# EAGLE board ProiectTSC_pcb (EAGLE 9.7.0)
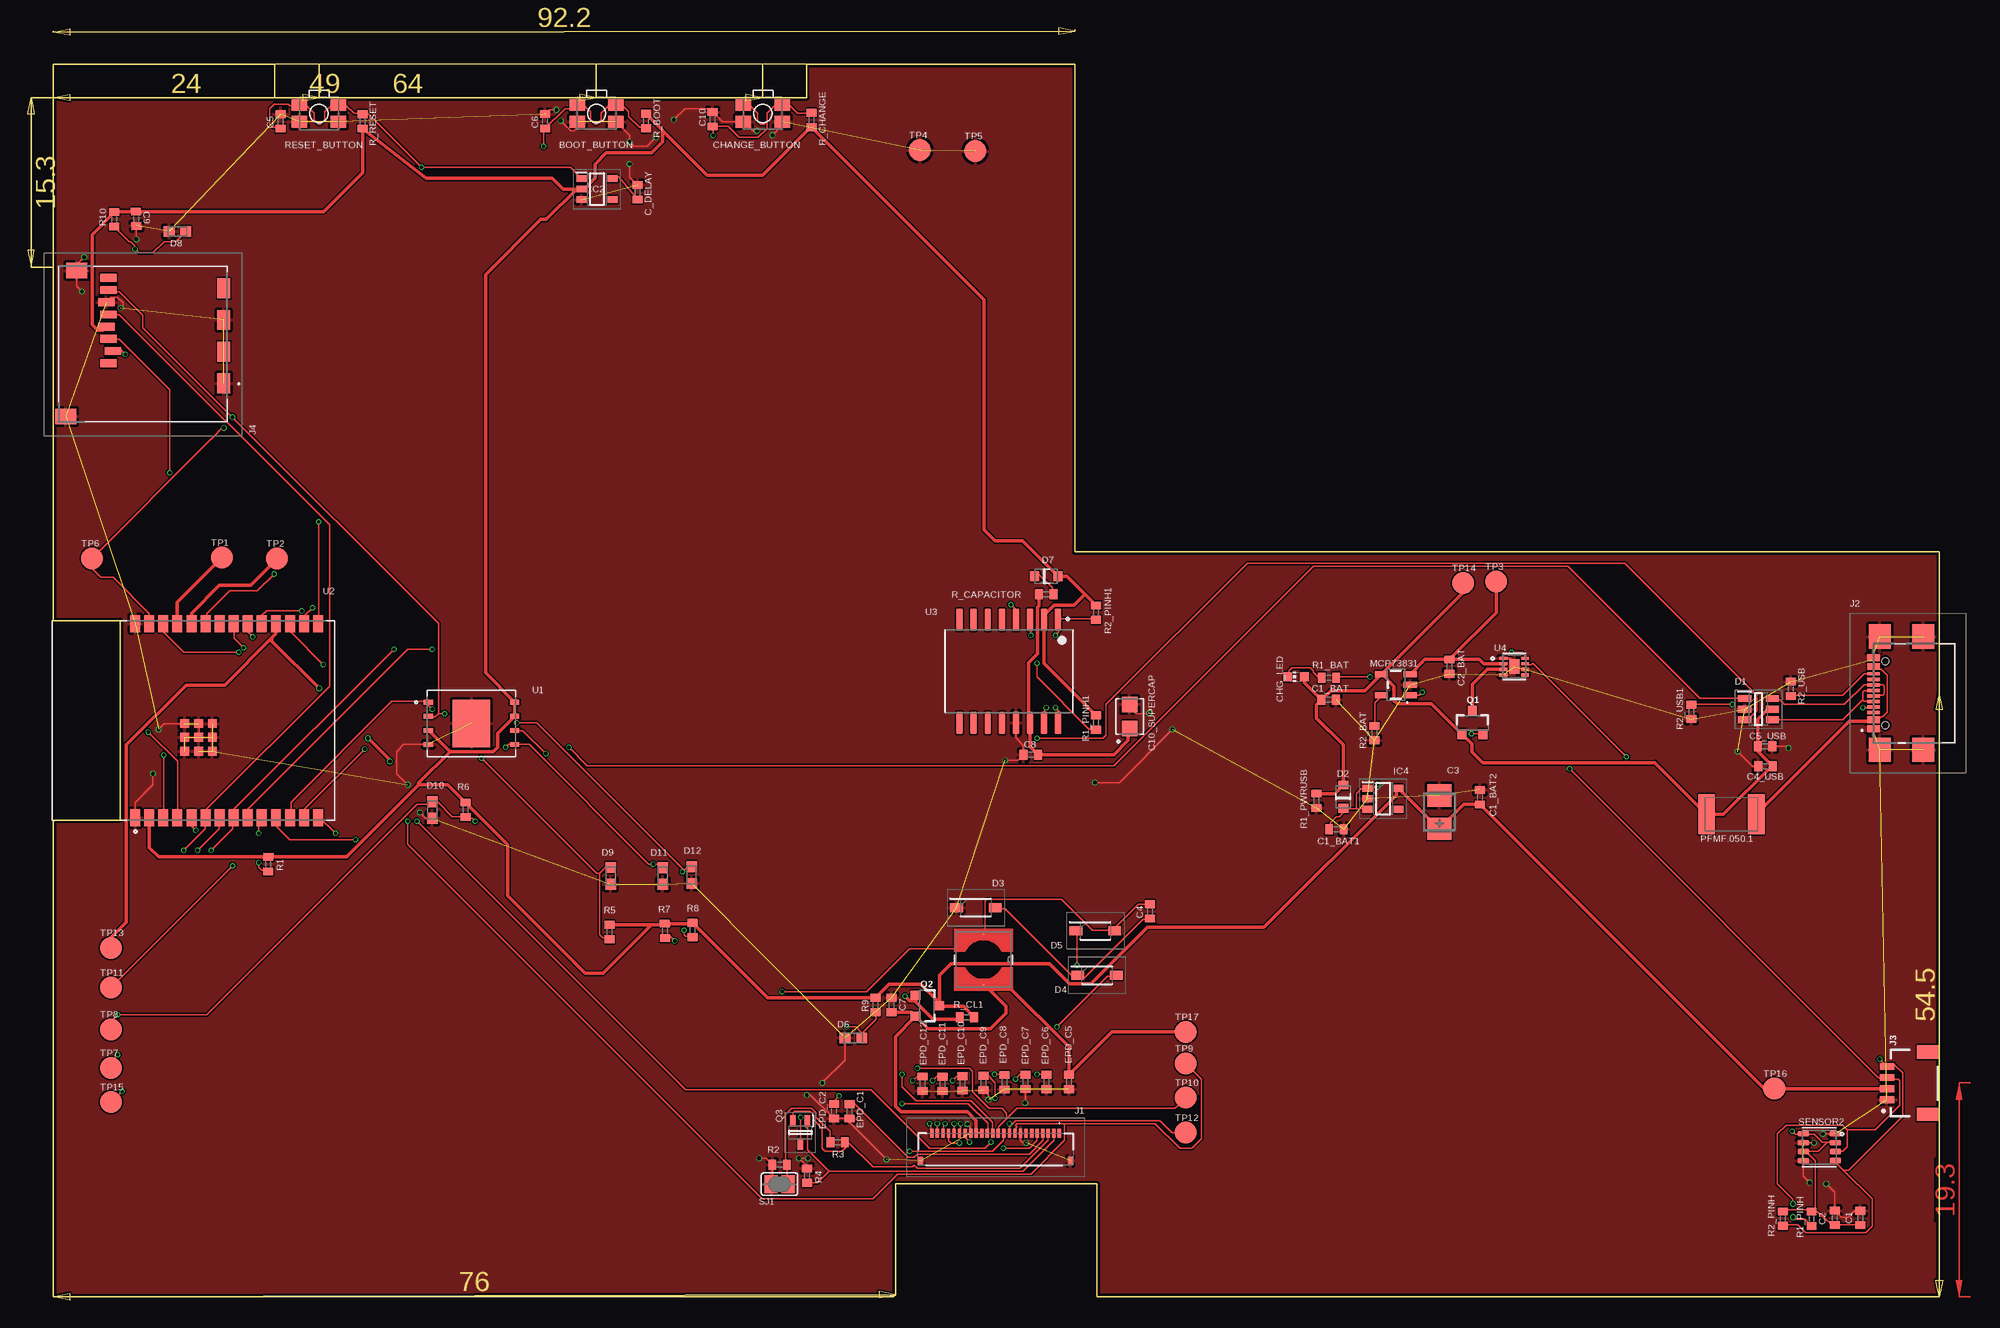
[diagram p0: board, top side]
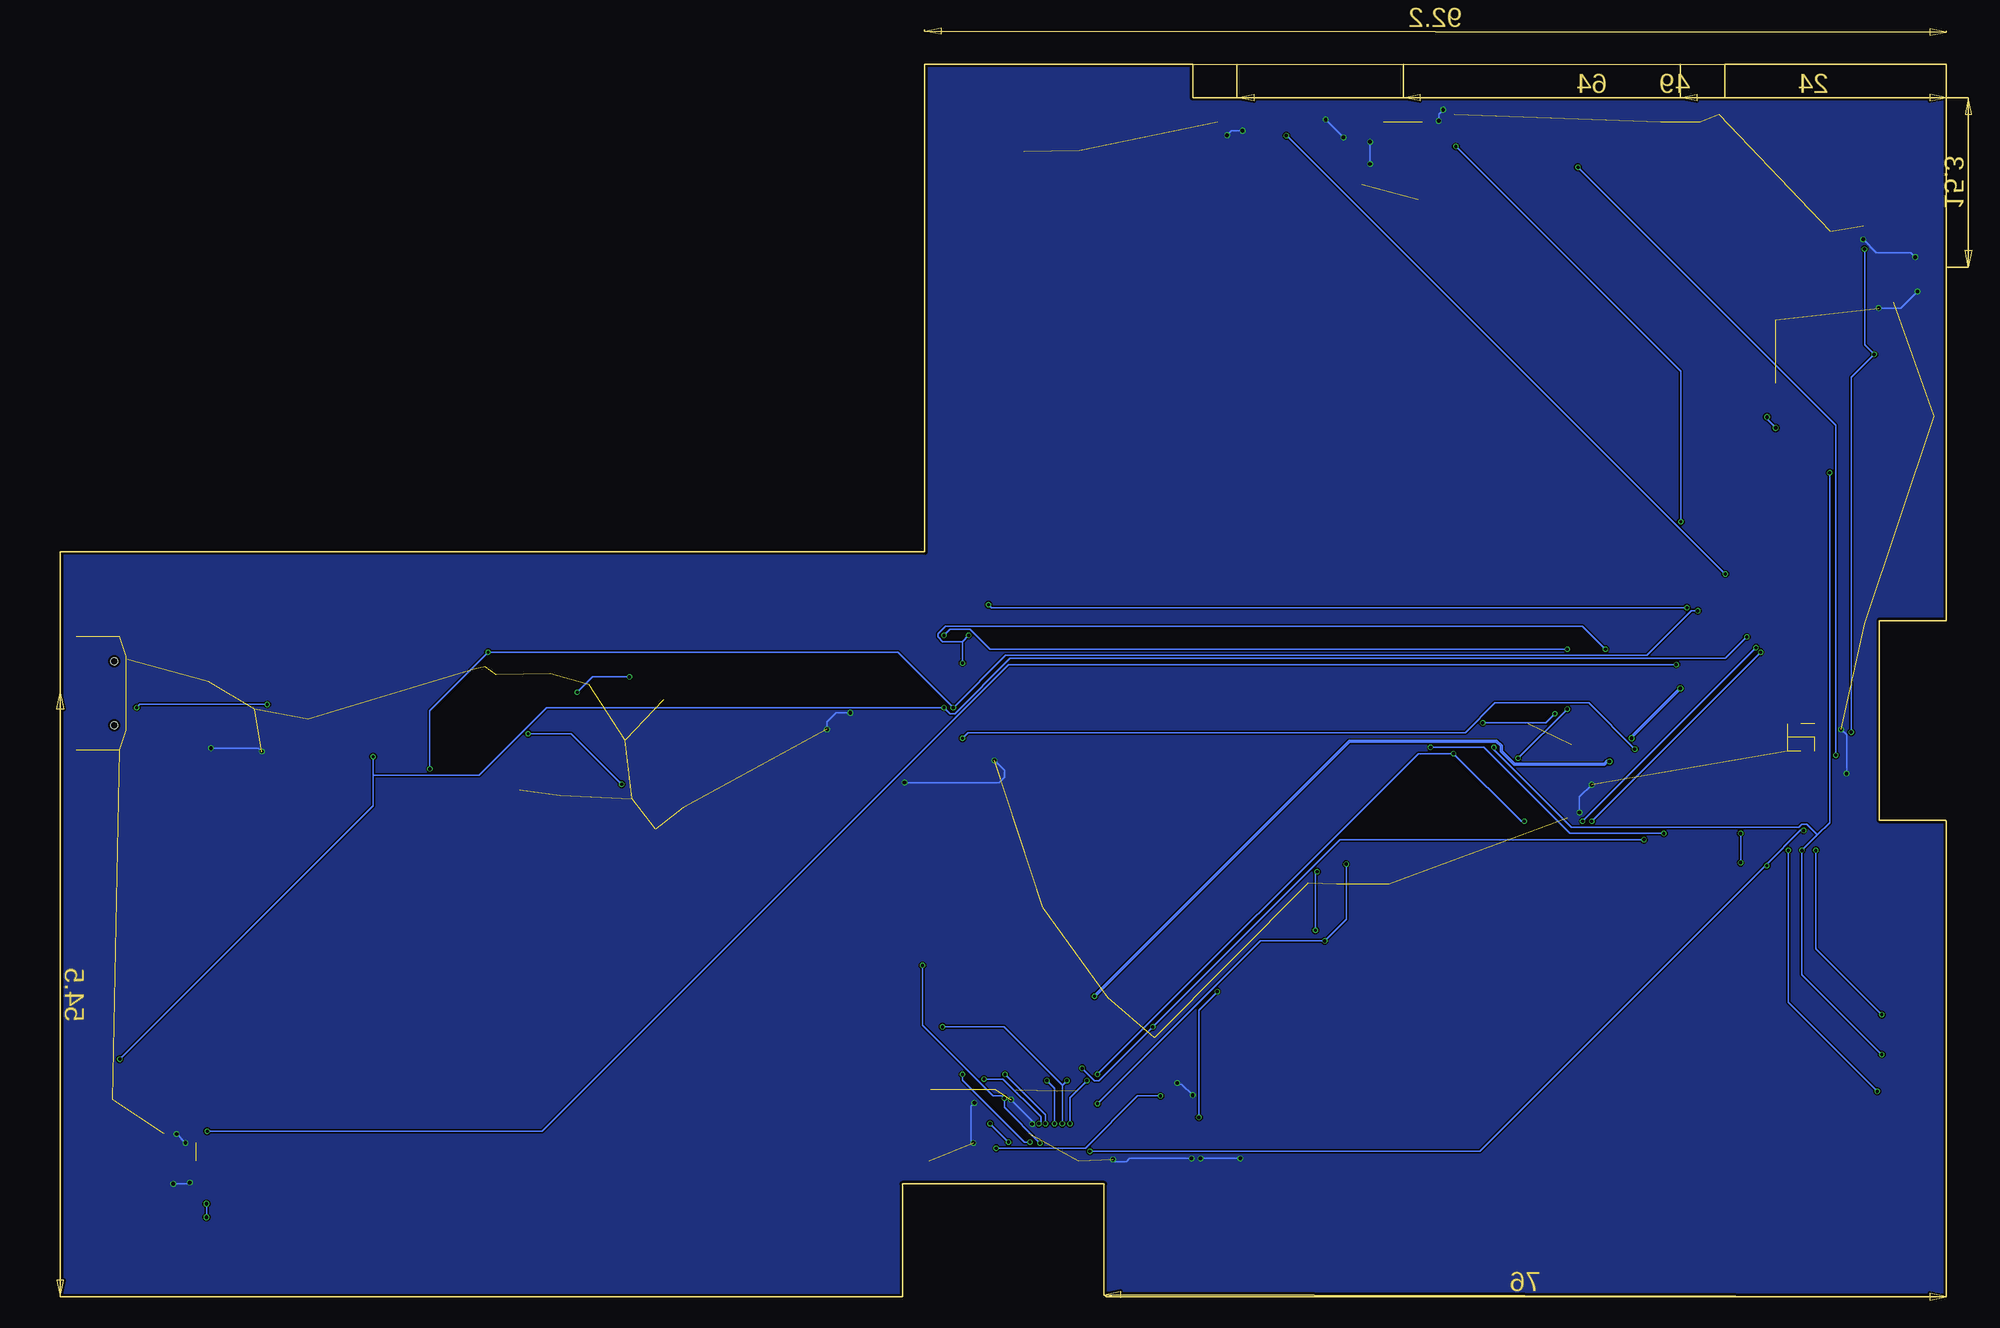
[diagram p1: board, bottom side, seen from below]

Size 170.2 x 111.2 mm. Coordinates in mm from the lower left corner, seen from the top.
Outline: 68,111.2 20,111.2
Outline: 20,111.2 20,108.2 68,108.2 68,111.2
Outline: 20,111.2 0,111.2 0,61 6.04,61 6.04,43 0.09,43 0,42.91 0,0 75.8,0 76,0.2 76,10.2 94.2,10.2 94.2,0 170.2,0 170.2,67.2 92.2,67.2 92.2,111.2 68,111.2
Copper layers (1*16): Top 0.035mm / dielectric 1.6mm / Bottom 0.035mm
Design rules "jlcpcb-2layers *": minimum track width 0.15mm, minimum drill 0.3mm, track to track 5mil, track to pad 5mil, pad to pad 5mil, via to via 5mil, smd to smd 5mil, copper to edge 0.2mm, drill to drill 6mil, minimum pad ring 10mil, minimum via ring 3mil, stop-mask expansion 4mil, vias tented up to drill 0mil, thermal gap 10mil

## Footprints (pad centres in the part's own frame; a part is rotated, then mirrored left to right if it is on the bottom)
MYBUTTON = smd 1.4 x 1.05: 1 1.75,0.75; 2 -1.75,0.75; 3 -1.75,-0.75; 4 1.75,-0.75
EAGLE-LTSPICE_C0402 = smd 0.7 x 0.9: 1 -0.65,0; 2 0.65,0
RCL_CT3528 = smd 2 x 2.2: + -1.5,0; - 1.5,0
CAPCP3225X100N = smd 1.4 x 1.4: 1 -1.1,0; 2 1.1,0
ADAFRUIT_CHIP-LED0603 = smd 0.8 x 0.8: A 0,-0.75; C 0,0.75
SOT95P280X145-6N = smd 1.2 x 0.6: 1 -1.25,0.95; 2 -1.25,0; 3 -1.25,-0.95; 4 1.25,-0.95; 5 1.25,0; 6 1.25,0.95
ESP32_WROVER_AVX---SD0805S020S1R0_AVX_SD0805S020S1R0_0 = smd 0.8 x 0.9: 1 -1.05,0; 2 1.05,0
SOD3716X135N = smd 1.15 x 0.8: 1 -1.75,0; 2 1.75,0
DIOC1608X36N = smd 0.97 x 0.94: 1 -0.75,0; 2 0.75,0
SOT95P280X125-5N = smd 0.9 x 0.6: 1 -1.4,0.95; 2 -1.4,0; 3 -1.4,-0.95; 4 1.4,-0.95; 5 1.4,0.95
SOT95P280X120-5N = smd 0.9 x 0.6: 1 -1.4,0.95; 2 -1.4,0; 3 -1.4,-0.95; 4 1.4,-0.95; 5 1.4,0.95
FH34SRJ24S05SH99 = smd 0.3 x 0.8: 1 5.75,1.45; 2 5.25,1.45; 3 4.75,1.45; 4 4.25,1.45; 5 3.75,1.45; 6 3.25,1.45; 7 2.75,1.45; 8 2.25,1.45; 9 1.75,1.45; 10 1.25,1.45; 11 0.75,1.45; 12 0.25,1.45; 13 -0.25,1.45; 14 -0.75,1.45; 15 -1.25,1.45; 16 -1.75,1.45; 17 -2.25,1.45; 18 -2.75,1.45; 19 -3.25,1.45; 20 -3.75,1.45; 21 -4.25,1.45; 22 -4.75,1.45; 23 -5.25,1.45; 24 -5.75,1.45 | smd 0.4 x 0.8: MP1 6.75,-1.05; MP2 -6.75,-1.05
SAMACSYS_PARTS_USB4110GFA = smd 0.3 x 1.15: A1 -3.35,3.678; A4 -2.55,3.678; A5 -1.25,3.678; A6 -0.25,3.678; A7 0.25,3.678; A8 1.25,3.678; A9 2.55,3.678; A12 3.35,3.678; B1 3.05,3.678; B4 2.25,3.678; B5 1.75,3.678; B6 0.75,3.678; B7 -0.75,3.678; B8 -1.75,3.678; B9 -2.25,3.678; B12 -3.05,3.678 | smd 2.18 x 2: MP1 -5.11,-0.827; MP2 5.11,-0.827; MP3 -5.11,3.103; MP4 5.11,3.103 | hole 0.65: -2.89,2.603; 2.89,2.603
JST04_1MM_RA = smd 0.6 x 1.35: 1 -1.5,0; 2 -0.5,0; 3 0.5,0; 4 1.5,0 | smd 1.2 x 2: NC1 2.8,-3.675; NC2 -2.8,-3.675
112ATAARR03ATTEND = smd 1.8 x 1.2: G1 10.6,10.4; G2 4.9,10.4; S1 7.75,10.4; S2 2.05,10.4 | smd 1.4 x 1.9: G3 13.6,-3.85; G4 0.45,-2.85 | smd 0.7 x 1.5: P1 8.8,0; P2 7.7,0.4; P3 6.6,0; P4 5.5,-0.2; P5 4.4,0; P6 3.3,-0.2; P7 2.2,0; P8 1.1,0
IND_4828-WE-TPC_WRE = smd 0.127 x 0.127: 1 -2.286,0; 2 2.286,0
ESP32_WROVER_SPARKFUN-IC-POWER_SOT23-5 = smd 0.55 x 1.2: 1 -0.95,-1.3; 2 0,-1.3; 3 0.95,-1.3; 4 0.95,1.3; 5 -0.95,1.3
ESP32C6_VARISTOR_CT/CN1812 = smd 1.5 x 3.6: 1 -2.25,0; 2 2.25,0
ESP32_WROVER_SPARKFUN-DISCRETESEMI_SOT23-3 = smd 0.8 x 0.9: 1 -0.95,-1; 2 0.95,-1; 3 0,1.1
SOT65P210X110-3N = smd 1.05 x 0.5: 1 -1.05,0.65; 2 -1.05,-0.65; 3 1.05,0
ESP32_WROVER_EAGLE-LTSPICE_R0402 = smd 0.7 x 0.9: 1 -0.65,0; 2 0.65,0
ESP32_WROVER_BME680_PSON80P300X300X100-8N = smd 1.016 x 0.5: 1 1.458,1.2; 2 1.458,0.4; 3 1.458,-0.4; 4 1.458,-1.2; 5 -1.458,-1.22; 6 -1.458,-0.4; 7 -1.458,0.4; 8 -1.458,1.2
SJ = smd 1.168 x 1.6: 1 -0.762,0; 2 0.762,0
TP20R = smd 2 x 2: TP 0,0
SON127P600X800X80-9N = smd 0.94 x 0.44: 1 -3.895,1.905; 2 -3.895,0.635; 3 -3.895,-0.635; 4 -3.895,-1.905; 5 3.895,-1.905; 6 3.895,-0.635; 7 3.895,0.635; 8 3.895,1.905 | smd 3.4 x 4.3: 9 0,0
XCVR_ESP32-C6-WROOM-1-N8 = smd 1.5 x 0.9: 1 -8.75,5.26; 2 -8.75,3.99; 3 -8.75,2.72; 4 -8.75,1.45; 5 -8.75,0.18; 6 -8.75,-1.09; 7 -8.75,-2.36; 8 -8.75,-3.63; 9 -8.75,-4.9; 10 -8.75,-6.17; 11 -8.75,-7.44; 12 -8.75,-8.71; 13 -8.75,-9.98; 14 -8.75,-11.25; 15 8.75,-11.25; 16 8.75,-9.98; 17 8.75,-8.71; 18 8.75,-7.44; 19 8.75,-6.17; 20 8.75,-4.9; 21 8.75,-3.63; 22 8.75,-2.36; 23 8.75,-1.09; 24 8.75,0.18; 25 8.75,1.45; 26 8.75,2.72; 27 8.75,3.99; 28 8.75,5.26 | smd 0.8 x 0.8: 29_1 -2.755,0.79; 29_2 -1.505,0.79; 29_3 -0.255,0.79; 29_4 -2.755,-0.46; 29_5 -1.505,-0.46; 29_6 -0.255,-0.46; 29_7 -2.755,-1.71; 29_8 -1.505,-1.71; 29_9 -0.255,-1.71
SOIC127P1032X265-16N = smd 2.05 x 0.59: 1 -4.655,4.445; 2 -4.655,3.175; 3 -4.655,1.905; 4 -4.655,0.635; 5 -4.655,-0.635; 6 -4.655,-1.905; 7 -4.655,-3.175; 8 -4.655,-4.445; 9 4.655,-4.445; 10 4.655,-3.175; 11 4.655,-1.905; 12 4.655,-0.635; 13 4.655,0.635; 14 4.655,1.905; 15 4.655,3.175; 16 4.655,4.445
SON50P200X200X80-9N = smd 0.76 x 0.27: 1 -0.985,0.75; 2 -0.985,0.25; 3 -0.985,-0.25; 4 -0.985,-0.75; 5 0.985,-0.75; 6 0.985,-0.25; 7 0.985,0.25; 8 0.985,0.75 | smd 0.9 x 1.3: 9 0,0

## Placement (x,y rotation side)
BOOT_BUTTON  BUTTON_CUSYOMV1  [MYBUTTON]  49.03,106.77 180 top
C1  100nF  [EAGLE-LTSPICE_C0402]  163.07,7.13 90 top
C1_BAT  4.7uF  [EAGLE-LTSPICE_C0402]  115.1,53.86 0 top
C1_BAT1  4.7uF  [EAGLE-LTSPICE_C0402]  115.8,42.18 0 top
C1_BAT2  4.7uF  [EAGLE-LTSPICE_C0402]  128.76,45.08 90 top
C2  100nF  [EAGLE-LTSPICE_C0402]  160.77,7.14 90 top
C2_BAT  4.7uF  [EAGLE-LTSPICE_C0402]  126.01,56.86 270 top
C3  100uF  [RCL_CT3528]  125.09,43.74 90 top
C4  4.7uF/25V  [EAGLE-LTSPICE_C0402]  98.98,34.78 90 top
C4_USB  100nF  [EAGLE-LTSPICE_C0402]  154.52,47.88 180 top
C5  1uF  [EAGLE-LTSPICE_C0402]  20.52,106.05 90 top
C5_USB  4.7uF  [EAGLE-LTSPICE_C0402]  154.48,49.66 0 top
C6  100nF  [EAGLE-LTSPICE_C0402]  44.41,106.06 90 top
C7  10uF  [EAGLE-LTSPICE_C0402]  75.67,26.34 90 top
C8  100nF  [EAGLE-LTSPICE_C0402]  88.21,48.9 0 top
C9  100nF  [EAGLE-LTSPICE_C0402]  7.49,97.26 271.6 top
C10  100nF  [EAGLE-LTSPICE_C0402]  59.52,106.24 90 top
C10_SUPERCAP  CPH3225A  [CAPCP3225X100N]  97.13,52.36 90 top
C_DELAY  100nF  [EAGLE-LTSPICE_C0402]  52.72,99.66 90 top
CHANGE_BUTTON  BUTTON_CUSYOMV1  [MYBUTTON]  64.04,106.77 180 top
CHG_LED  [ADAFRUIT_CHIP-LED0603]  112.15,55.95 90 top
D1  USBLC6-2SC6Y  [SOT95P280X145-6N]  153.88,53.02 0 top
D2  ESP32_WROVER_AVX---SD0805S020S1R0_AVX_SD0805S020S1R0_0_0AVX_SD0805S020S1R0_0_0  [ESP32_WROVER_AVX---SD0805S020S1R0_AVX_SD0805S020S1R0_0]  116.41,45.13 90 top
D3  MBR0530  [SOD3716X135N]  83.26,35.12 0 top
D4  MBR0530  [SOD3716X135N]  94.2,29.02 0 top
D5  MBR0530  [SOD3716X135N]  94.04,33.02 0 top
D6  PGB1010603MR  [DIOC1608X36N]  72.21,23.36 0 top
D7  ESP32_WROVER_AVX---SD0805S020S1R0_AVX_SD0805S020S1R0_0_0AVX_SD0805S020S1R0_0_0  [ESP32_WROVER_AVX---SD0805S020S1R0_AVX_SD0805S020S1R0_0]  89.61,65.01 0 top
D8  PGB1010603MR  [DIOC1608X36N]  11.21,96.12 0 top
D9  PGB1010603MR  [DIOC1608X36N]  50.31,37.98 90 top
D10  PGB1010603MR  [DIOC1608X36N]  34.21,43.93 90 top
D11  PGB1010603MR  [DIOC1608X36N]  55.01,37.97 90 top
D12  PGB1010603MR  [DIOC1608X36N]  57.61,38.05 90 top
EPD_C1  1uF/50V  [EAGLE-LTSPICE_C0402]  71.85,16.74 90 top
EPD_C2  1uF/50V  [EAGLE-LTSPICE_C0402]  70.45,16.75 90 top
EPD_C5  0.1uF/50V  [EAGLE-LTSPICE_C0402]  91.65,19.38 90 top
EPD_C6  1uF/50V  [EAGLE-LTSPICE_C0402]  89.65,19.39 90 top
EPD_C7  1uF/50V  [EAGLE-LTSPICE_C0402]  87.75,19.4 90 top
EPD_C8  1uF/50V  [EAGLE-LTSPICE_C0402]  85.85,19.37 90 top
EPD_C9  1uF/50V  [EAGLE-LTSPICE_C0402]  83.95,19.31 90 top
EPD_C10  1uF/50V  [EAGLE-LTSPICE_C0402]  82.05,19.26 90 top
EPD_C11  1uF/50V  [EAGLE-LTSPICE_C0402]  80.25,19.22 90 top
EPD_C12  1uF/50V  [EAGLE-LTSPICE_C0402]  78.45,19.23 90 top
IC2  BD5229G-TR  [SOT95P280X125-5N]  49.07,99.94 0 top
IC4  XC6220A331MR-G  [SOT95P280X120-5N]  120.01,44.94 0 top
J1  FH34SRJ-24S-0.5SH_99_  [FH34SRJ24S05SH99]  85.04,13.31 0 top
J2  SAMACSYS_PARTS_USB4110-GF-A  [SAMACSYS_PARTS_USB4110GFA]  167.93,54.46 90 top
J3  QWIIC_RIGHT_ANGLE  [JST04_1MM_RA]  165.48,19.28 90 top
J4  112A-TAAR-R03_ATTEND  [112ATAARR03ATTEND]  4.99,93.03 270 top
L1  68uH  [IND_4828-WE-TPC_WRE]  83.95,30.43 270 top
MCP73831  ESP32_WROVER_SPARKFUN-IC-POWER_MCP73831  [ESP32_WROVER_SPARKFUN-IC-POWER_SOT23-5]  121.16,55.23 90 top
PFMF.050.1  ESP32C6_VARISTORCN1812  [ESP32C6_VARISTOR_CT/CN1812]  151.44,43.54 180 top
Q1  20V/4.2A/52mΩ/1.4W  [ESP32_WROVER_SPARKFUN-DISCRETESEMI_SOT23-3]  128.07,51.76 0 top
Q2  20V/4.2A/52mΩ/1.4W  [ESP32_WROVER_SPARKFUN-DISCRETESEMI_SOT23-3]  78.82,26.26 270 top
Q3  SI1308EDL-T1-GE3  [SOT65P210X110-3N]  67.41,14.83 270 top
R1  10K  [ESP32_WROVER_EAGLE-LTSPICE_R0402]  19.41,39.04 89 top
R1_BAT  200  [ESP32_WROVER_EAGLE-LTSPICE_R0402]  115.12,55.86 0 top
R1_PINH  10K  [ESP32_WROVER_EAGLE-LTSPICE_R0402]  158.67,7.05 90 top
R1_PINH1  10K  [ESP32_WROVER_EAGLE-LTSPICE_R0402]  94.11,51.82 90 top
R1_PWRUSB  100K  [ESP32_WROVER_EAGLE-LTSPICE_R0402]  113.98,44.76 90 top
R2  2.2  [ESP32_WROVER_EAGLE-LTSPICE_R0402]  65.55,11.94 0 top
R2_BAT  2K  [ESP32_WROVER_EAGLE-LTSPICE_R0402]  119.23,50.86 90 top
R2_PINH  10K  [ESP32_WROVER_EAGLE-LTSPICE_R0402]  156.07,7.06 90 top
R2_PINH1  10K  [ESP32_WROVER_EAGLE-LTSPICE_R0402]  94.11,61.73 90 top
R2_USB  5k1  [ESP32_WROVER_EAGLE-LTSPICE_R0402]  156.79,54.86 90 top
R2_USB1  5k1  [ESP32_WROVER_EAGLE-LTSPICE_R0402]  147.82,52.78 90 top
R3  0.47  [ESP32_WROVER_EAGLE-LTSPICE_R0402]  70.79,13.94 0 top
R4  10K  [ESP32_WROVER_EAGLE-LTSPICE_R0402]  68.03,10.94 270 top
R5  10K  [ESP32_WROVER_EAGLE-LTSPICE_R0402]  50.21,32.92 90 top
R6  10K  [ESP32_WROVER_EAGLE-LTSPICE_R0402]  37.21,43.95 90 top
R7  10K  [ESP32_WROVER_EAGLE-LTSPICE_R0402]  55.21,33.03 91.3 top
R8  10K  [ESP32_WROVER_EAGLE-LTSPICE_R0402]  57.71,33.1 90 top
R9  10K  [ESP32_WROVER_EAGLE-LTSPICE_R0402]  74.21,26.34 90 top
R10  10K  [ESP32_WROVER_EAGLE-LTSPICE_R0402]  5.51,97.21 89.3 top
R_BOOT  10K  [ESP32_WROVER_EAGLE-LTSPICE_R0402]  53.51,106.08 90 top
R_CAPACITOR  15  [ESP32_WROVER_EAGLE-LTSPICE_R0402]  89.61,63.39 180 top
R_CHANGE  10K  [ESP32_WROVER_EAGLE-LTSPICE_R0402]  68.44,106.18 90 top
R_CL1  10K  [ESP32_WROVER_EAGLE-LTSPICE_R0402]  82.45,25.24 0 top
R_RESET  10K  [ESP32_WROVER_EAGLE-LTSPICE_R0402]  27.91,106.05 270 top
RESET_BUTTON  BUTTON_CUSYOMV1  [MYBUTTON]  23.99,106.76 180 top
SENSOR2  ESP32_WROVER_BME680_BME680  [ESP32_WROVER_BME680_PSON80P300X300X100-8N]  159.37,13.51 0 top
SJ1  [SJ]  65.54,10.17 0 top
TP1  TPTP20R  [TP20R]  15.21,66.69 0 top
TP2  TPTP20R  [TP20R]  20.21,66.61 0 top
TP3  TPTP20R  [TP20R]  130.21,64.53 0 top
TP4  TPTP20R  [TP20R]  78.21,103.45 0 top
TP5  TPTP20R  [TP20R]  83.21,103.37 0 top
TP6  TPTP20R  [TP20R]  3.51,66.63 0 top
TP7  TPTP20R  [TP20R]  5.21,20.65 0 top
TP8  TPTP20R  [TP20R]  5.21,24.13 0 top
TP9  TPTP20R  [TP20R]  102.21,21.05 0 top
TP10  TPTP20R  [TP20R]  102.21,17.97 0 top
TP11  TPTP20R  [TP20R]  5.21,27.89 0 top
TP12  TPTP20R  [TP20R]  102.21,14.81 0 top
TP13  TPTP20R  [TP20R]  5.21,31.49 0 top
TP14  TPTP20R  [TP20R]  127.21,64.41 0 top
TP15  TPTP20R  [TP20R]  5.21,17.57 0 top
TP16  TPTP20R  [TP20R]  155.31,18.79 0 top
TP17  TPTP20R  [TP20R]  102.21,23.91 0 top
U1  W25Q512JVEIQ  [SON127P600X800X80-9N]  37.75,51.74 0 top
U2  ESP32-C6-WROOM-1-N8  [XCVR_ESP32-C6-WROOM-1-N8]  12.66,51.98 90 top
U3  DS3231SN#  [SOIC127P1032X265-16N]  86.24,56.44 270 top
U4  MAX17048G+T10  [SON50P200X200X80-9N]  131.85,56.86 0 top

## Library data of the parts
BOOT_BUTTON CHANGE_BUTTON CHG_LED PFMF.050.1 RESET_BUTTON SJ1 TP1-TP17 = DeskAssistant v19 v1
C1 C1_BAT C1_BAT1 C1_BAT2 C2 C2_BAT C4 C4_USB C5 C5_USB C6-C10 C_DELAY EPD_C1 EPD_C2 EPD_C5-EPD_C12 = DeskAssistant v19 v1; SPICEMODEL: NONE; SPICEPREFIX: C
C3 = DeskAssistant v19 v1; SPICEPREFIX: C
C10_SUPERCAP = DeskAssistant v19 v1; AVAILABILITY: Not in stock; CHECK_PRICES: https://www.snapeda.com/parts/CPH3225A/Seiko+Instruments/view-part/?ref=eda; DESCRIPTION: 11 mF (EDLC) Supercapacitor 3.3 V 1210 (3225 Metric) - -; MF: Seiko Instruments; MP: CPH3225A; PACKAGE: 1210 Seiko; PRICE: None; PURCHASE-URL: https://www.snapeda.com/api/url_track_click_mouser/?unipart_id=562593&manufacturer=Seiko Instruments&part_name=CPH3225A&search_term=None; SNAPEDA_LINK: https://www.snapeda.com/parts/CPH3225A/Seiko+Instruments/view-part/?ref=snap
D1 = DeskAssistant v19 v1; AVAILABILITY: In Stock; CHECK_PRICES: https://www.snapeda.com/parts/USBLC6-2SC6Y/STMicroelectronics/view-part/?ref=eda; DESCRIPTION: 17V Clamp 5A (8/20µs) Ipp Tvs Diode Surface Mount SOT-23-6; MF: STMicroelectronics; MP: USBLC6-2SC6Y; PACKAGE: SOT-23-6 STMicroelectronics; PRICE: None; SNAPEDA_LINK: https://www.snapeda.com/parts/USBLC6-2SC6Y/STMicroelectronics/view-part/?ref=snap
D2 D7 = DeskAssistant v19 v1; CENTROID_NOT_SPECIFIED: No; DATASHEET: http://datasheets.avx.com/schottky.pdf; DIGIKEY_DESCRIPTION: DIODE SCHOTTKY 20V 1A 0805; DIGIKEY_PART_NUMBER: 478-7800-1-ND; LEAD_FREE: yes; MF: AVX; MOUSER_PART_NUMBER: 581-SD0805S020S1R0; PACKAGE: 0805 (2012 metric); PREFIX: D; ROHS: yes; TEMPERATURE_RANGE_HIGH: +125°C; TEMPERATURE_RANGE_LOW: -55°C
D3-D5 = DeskAssistant v19 v1; AVAILABILITY: In Stock; CHECK_PRICES: https://www.snapeda.com/parts/MBR0530/Onsemi/view-part/?ref=eda; DESCRIPTION: Diode Schottky 30 V 500mA Surface Mount SOD-123; MF: ON Semiconductor; MP: MBR0530; PACKAGE: SOD-123-2 ON Semiconductor; PRICE: None; PURCHASE-URL: https://www.snapeda.com/api/url_track_click_mouser/?unipart_id=179458&manufacturer=ON Semiconductor&part_name=MBR0530&search_term=None; SNAPEDA_LINK: https://www.snapeda.com/parts/MBR0530/Onsemi/view-part/?ref=snap
D6 D8-D12 = DeskAssistant v19 v1; AVAILABILITY: In Stock; CHECK_PRICES: https://www.snapeda.com/parts/PGB1010603MR/Littelfuse/view-part/?ref=eda; DESCRIPTION: 150V (Typ) Clamp - Ipp Tvs Diode Surface Mount 0603 (1608 Metric); MF: Littelfuse Inc.; MP: PGB1010603MR; PACKAGE: 0603 Littelfuse Inc.; PRICE: None; PURCHASE-URL: https://www.snapeda.com/api/url_track_click_mouser/?unipart_id=5659453&manufacturer=Littelfuse Inc.&part_name=PGB1010603MR&search_term=None; SNAPEDA_LINK: https://www.snapeda.com/parts/PGB1010603MR/Littelfuse/view-part/?ref=snap
IC2 = DeskAssistant v19 v1; DESCRIPTION: Voltage Detector with Adjustable Delay Time: CMOS processes are utilized to develop high precision, low current consumption CMOS reset ICs that allow arbitrary setting of the delay time. The extensive lineup includes both Nch Open Drain and CMOS output types in a wide range of detection voltages (from 2.3V to 6.0V, in 0.1V steps), enabling selection of the ideal solution based on customer requirements. In addition, the entire series is of course both lead-free and RoHS-compliant.; HEIGHT: 1.25mm; MANUFACTURER_NAME: ROHM Semiconductor; MANUFACTURER_PART_NUMBER: BD5229G-TR; MOUSER_PART_NUMBER: 755-BD5229G-TR; MOUSER_PRICE-STOCK: https://www.mouser.co.uk/ProductDetail/ROHM-Semiconductor/BD5229G-TR?qs=4kLU8WoGk0vvnhrrYwdszw%3D%3D
IC4 = DeskAssistant v19 v1; DESCRIPTION: LDO Voltage Regulators; HEIGHT: 1.2mm; MANUFACTURER_NAME: Torex; MANUFACTURER_PART_NUMBER: XC6220A331MR-G; MOUSER_PART_NUMBER: 865-XC6220A331MR-G; MOUSER_PRICE-STOCK: https://www.mouser.co.uk/ProductDetail/Torex-Semiconductor/XC6220A331MR-G?qs=AsjdqWjXhJ8ZSWznL1J0gg%3D%3D
J1 = DeskAssistant v19 v1; DESCRIPTION: 24 Position FFC, FPC Connector Contacts, Top and Bottom 0.020" (0.50mm) Surface Mount, Right Angle; HEIGHT: 1.1mm; MANUFACTURER_NAME: Hirose; MANUFACTURER_PART_NUMBER: FH34SRJ-24S-0.5SH(99); MOUSER_PART_NUMBER: 798-FH34SRJ24S05SH99; MOUSER_PRICE-STOCK: https://www.mouser.co.uk/ProductDetail/Hirose-Connector/FH34SRJ-24S-0.5SH99?qs=vcbW%252B4%252BSTIpKBl5ap9J8Fw%3D%3D
J2 = DeskAssistant v19 v1; DESCRIPTION: CONN USB 2.0 TYPE-C R/A SMT; HEIGHT: 3.26mm; MANUFACTURER_NAME: GCT (GLOBAL CONNECTOR TECHNOLOGY); MANUFACTURER_PART_NUMBER: USB4110-GF-A; MOUSER_PART_NUMBER: 640-USB4110-GF-A; MOUSER_PRICE-STOCK: https://www.mouser.co.uk/ProductDetail/GCT/USB4110-GF-A?qs=KUoIvG%2F9IlYiZvIXQjyJeA%3D%3D
J3 = DeskAssistant v19 v1; PROD_ID: CONN-13694
J4 = DeskAssistant v19 v1; DESCRIPTION: Micro SD Card Socket, Push-Push Type, Top Mount, SMT, H=1.83mm, 10u; HEIGHT: 1.9mm; MANUFACTURER_NAME: ATTEND; MANUFACTURER_PART_NUMBER: 112A-TAAR-R03 ATTEND
L1 = DeskAssistant v19 v1; COPYRIGHT: Copyright (C) 2024 Ultra Librarian. All rights reserved.; MANUFACTURER_PART_NUMBER: 744043680; MFR_NAME: Wurth Electronics
MCP73831 = DeskAssistant v19 v1; PROD_ID: IC-09995
Q1 Q2 = DeskAssistant v19 v1; PROD_ID: TRAN-14388
Q3 = DeskAssistant v19 v1; AVAILABILITY: In Stock; CHECK_PRICES: https://www.snapeda.com/parts/SI1308EDL-T1-GE3/Vishay+Siliconix/view-part/?ref=eda; DESCRIPTION: Si1308EDL-T1-GE3 N-channel MOSFET Transistor, 1.5 A, 30 V, 3-Pin SC-70 | Siliconix / Vishay SI1308EDL-T1-GE3; MF: Vishay Siliconix; MP: SI1308EDL-T1-GE3; PACKAGE: SOT-323 Vishay Semiconductor; PRICE: None; PURCHASE-URL: https://www.snapeda.com/api/url_track_click_mouser/?unipart_id=274603&manufacturer=Vishay Siliconix&part_name=SI1308EDL-T1-GE3&search_term=None; SNAPEDA_LINK: https://www.snapeda.com/parts/SI1308EDL-T1-GE3/Vishay+Siliconix/view-part/?ref=snap
R1 R1_BAT R1_PINH R1_PINH1 R1_PWRUSB R2 R2_BAT R2_PINH R2_PINH1 R2_USB R2_USB1 R3-R10 R_BOOT R_CAPACITOR R_CHANGE R_CL1 R_RESET = DeskAssistant v19 v1; SPICEMODEL: NONE; SPICEPREFIX: R
SENSOR2 = DeskAssistant v19 v1; AVAILABILITY: Unavailable; DESCRIPTION: Integrated Environmental Unit; MF: Bosch Sensortec; MP: BME680; PACKAGE: LGA-8 Bosch Tools; PRICE: None
U1 = DeskAssistant v19 v1; AVAILABILITY: In Stock; CHECK_PRICES: https://www.snapeda.com/parts/W25Q512JVEIQ/Winbond+Electronics/view-part/?ref=eda; DESCRIPTION: FLASH - NOR Memory IC 512Mb (64M x 8) SPI - Quad I/O 133 MHz 8-WSON (8x6); MF: Winbond Electronics; MP: W25Q512JVEIQ; PACKAGE: Package; PRICE: None; SNAPEDA_LINK: https://www.snapeda.com/parts/W25Q512JVEIQ/Winbond+Electronics/view-part/?ref=snap
U2 = DeskAssistant v19 v1; AVAILABILITY: In Stock; CHECK_PRICES: https://www.snapeda.com/parts/ESP32-C6-WROOM-1-N8/Espressif+Systems/view-part/?ref=eda; DESCRIPTION: Multiprotocol Modules ESP32-C6 module, Wi-Fi 6 in 2.4 GHz band, Bluetooth 5, Zigbee 3.0 and Thread. ESP34-WROOM Compatible - ENGINEERING SAMPLE; MF: Espressif Systems; MP: ESP32-C6-WROOM-1-N8; PACKAGE: None; PRICE: None; SNAPEDA_LINK: https://www.snapeda.com/parts/ESP32-C6-WROOM-1-N8/Espressif+Systems/view-part/?ref=snap
U3 = DeskAssistant v19 v1; AVAILABILITY: In Stock; CHECK_PRICES: https://www.snapeda.com/parts/DS3231SN%23/Analog+Devices/view-part/?ref=eda; DESCRIPTION: Extremely Accurate I²C-Integrated RTC/TCXO/Crystal; MF: Analog Devices; MP: DS3231SN#; PACKAGE: SOIC-16 Maxim; PRICE: None; PURCHASE-URL: https://www.snapeda.com/api/url_track_click_mouser/?unipart_id=99048&manufacturer=Analog Devices&part_name=DS3231SN#&search_term=None; SNAPEDA_LINK: https://www.snapeda.com/parts/DS3231SN%23/Analog+Devices/view-part/?ref=snap
U4 = DeskAssistant v19 v1; AVAILABILITY: In Stock; CHECK_PRICES: https://www.snapeda.com/parts/MAX17048G+T10/Analog+Devices/view-part/?ref=eda; DESCRIPTION: 3µA 1-Cell/2-Cell Fuel Gauge with ModelGauge; MF: Analog Devices; MP: MAX17048G+T10; PACKAGE: TDFN-8 Maxim; PRICE: None; PURCHASE-URL: https://www.snapeda.com/api/url_track_click_mouser/?unipart_id=329239&manufacturer=Analog Devices&part_name=MAX17048G+T10&search_term=None; SNAPEDA_LINK: https://www.snapeda.com/parts/MAX17048G+T10/Analog+Devices/view-part/?ref=snap

## Nets
3V3: C1_BAT2.1 C3.+ C9.1 D7.2 IC2.2 IC4.5 J3.2 J4.P4 Q2.3 R1.2 R1_PINH1.2 R2_PINH1.2 R5.2 R6.2 R7.2 R8.2 R9.2 R10.2 R_BOOT.2 R_CHANGE.1 R_CL1.2 R_RESET.2 TP16.TP U1.3 U1.7 U1.8 U2.2 U3.2
32KHZ: R2_PINH1.1 U2.9 U3.1
DN: D1.4 J2.A7 J2.B7
DP: D1.6 J2.A6 J2.B6
EPD_3V3: C7.1 EPD_C5.2 J1.15 J1.16 L1.2 Q2.2 TP17.TP
EPD_3V3_C: Q2.1 R_CL1.1 TP13.TP U2.18
EPD_BUSY: J1.9 TP9.TP U2.26
EPD_CS: D6.2 J1.12 R9.1 TP10.TP U2.11
EPD_DC: J1.11 TP11.TP U2.5
EPD_RST: J1.10 TP12.TP U2.21
FLASH_CS: D9.2 R5.1 U1.1 U2.12
GDR: J1.2 Q3.1 R4.2
GND: BOOT_BUTTON.1 BOOT_BUTTON.2 C1.2 C1_BAT1.2 C1_BAT2.2 C1_BAT.2 C2.2 C2_BAT.2 C3.- C4_USB.2 C5.2 C5_USB.2 C6.2 C7.2 C8.1 C9.2 C10.2 C10_SUPERCAP.2 C_DELAY.2 CHANGE_BUTTON.1 CHANGE_BUTTON.2 D1.2 D3.1 D6.1 D8.1 D9.1 D10.1 D11.1 D12.1 EPD_C1.1 EPD_C2.1 EPD_C5.1 EPD_C6.1 EPD_C7.1 EPD_C8.1 EPD_C9.1 EPD_C10.1 EPD_C11.1 EPD_C12.1 IC2.3 IC4.2 J1.8 J1.17 J1.MP1 J1.MP2 J2.A1 J2.A12 J2.B1 J2.B12 J2.MP1 J2.MP2 J2.MP3 J2.MP4 J3.1 J4.G1 J4.G2 J4.G3 J4.G4 J4.P6 MCP73831.2 R1_PWRUSB.1 R2.1 R2_BAT.1 R2_USB1.1 R2_USB.2 R4.1 RESET_BUTTON.1 RESET_BUTTON.2 SENSOR2.1 SENSOR2.5 SENSOR2.7 SJ1.1 TP4.TP TP5.TP U1.4 U1.9 U2.1 U2.28 U2.29_1 U2.29_2 U2.29_3 U2.29_4 U2.29_5 U2.29_6 U2.29_7 U2.29_8 U2.29_9 U3.13 U4.1 U4.4 U4.6 U4.9
GPIO8: R1.1 U2.10
I2C_PW: C1.1 C2.1 R1_PINH.2 R2_PINH.2 SENSOR2.2 SENSOR2.6 SENSOR2.8 U2.17
INT_RTC: R1_PINH1.1 TP15.TP U2.8 U3.3
IO/BOOT: BOOT_BUTTON.3 BOOT_BUTTON.4 C6.1 R_BOOT.1 U2.15
IO/CHANGE: C10.1 CHANGE_BUTTON.3 CHANGE_BUTTON.4 R_CHANGE.2 U2.23
MISO: D12.2 J4.P7 R8.1 TP6.TP U1.2 U2.27
MOSI: D11.2 J1.14 J4.P3 R7.1 TP7.TP U1.5 U2.7
N$1: C1_BAT1.1 D2.1 IC4.1 IC4.3 Q1.2
N$2: MCP73831.1 R1_BAT.2
N$3: CHG_LED.C R1_BAT.1
N$4: MCP73831.5 R2_BAT.2
N$5: J2.B5 R2_USB.1
N$6: J2.A5 R2_USB1.2
N$10: C4.1 D3.2 D4.1
N$11: D7.1 R_CAPACITOR.1
N$12: C_DELAY.1 IC2.5
N$13: EPD_C12.2 J1.24
N$15: EPD_C10.2 J1.22
N$17: EPD_C8.2 J1.20
N$18: EPD_C7.2 J1.19
N$19: EPD_C6.2 J1.18
N$21: EPD_C2.2 J1.5
N$22: EPD_C1.2 J1.4
PREVGH: D5.1 EPD_C9.2 J1.21
PREVGL: D4.2 EPD_C11.2 J1.23
RESE: J1.3 Q3.2 R3.2
RESE': R2.2 R3.1 SJ1.2
RESET: C5.1 IC2.1 R_RESET.1 RESET_BUTTON.3 RESET_BUTTON.4 U2.3
RTC_RST: U2.16 U3.4
RX: TP2.TP U2.24
SCK: D10.2 J1.13 J4.P5 R6.1 TP8.TP U1.6 U2.6
SCL: J3.4 R2_PINH.1 SENSOR2.4 U2.20 U3.16 U4.7
SDA: J3.3 R1_PINH.1 SENSOR2.3 U2.19 U3.15 U4.8
SRC: C4.2 D5.2 L1.1 Q3.3
SS_SD: D8.2 J4.P2 R10.1 U2.4
TX: TP1.TP U2.25
USB_D+: D1.1 U2.14
USB_D-: D1.3 U2.13
VBAT: C2_BAT.1 MCP73831.3 Q1.3 TP3.TP U4.2 U4.3
VBUS: C1_BAT.1 C4_USB.1 C5_USB.1 CHG_LED.A D1.5 D2.2 MCP73831.4 PFMF.050.1.2 Q1.1 R1_PWRUSB.2 TP14.TP
VRTC: C8.2 C10_SUPERCAP.1 R_CAPACITOR.2 U3.14
VUSB: J2.A4 J2.A9 J2.B4 J2.B9 PFMF.050.1.1

## Tracks (layer width: path | path; a pad name or v marks a point on that pad's centre or on a via)
3V3
  Top 0.15: 80.06,26.44 Q2.3 | 121.19,45.69 121.33,45.83 IC4.5
  Top 0.3: 47.2,99.94 46,99.94 45,100.94 33.67,100.94 R_RESET.2 27.91,101.41 24.4,97.9 7.48,97.9 C9.1 5.57,97.91 R10.2 3.5,95.84 3.5,87.7 4,87.2 4.46,87.2 J4.P4 | 47.2,99.94 IC2.2 47.94,99.94 48.9,100.9 48.9,102.2 49.9,103.2 54,103.2 55,104.2 55,105.2 | R_BOOT.2 55,105.24 55,105.2 | 35.8,49.2 39.7,49.2 40.1,49.6 40.1,50.83 U1.7 U1.8 39,56.29 39,92.2 44,97.2 44.5,97.2 47.2,99.9 47.2,99.94 | 35.8,49.2 33.9,51.11 U1.3 | 33,46.2 35.61,46.2 R6.2 41,40.81 41,36.2 48,29.2 49.63,29.2 54,33.57 | 33,46.2 33,46.4 35.8,49.2 | 33,46.2 26.49,39.69 R1.2 9.51,39.69 8.67,40.53 U2.2 | R5.2 54,33.57 | 54,33.57 55.09,33.57 R7.2 57.64,33.68 R8.2 64.47,26.99 R9.2 75.42,28.2 78.3,28.2 80.06,26.44 | 93.09,63.39 91.48,65.01 D7.2 87.47,68.2 85,68.2 84,69.2 84,89.97 R_CHANGE.1 68.33,105.53 64,101.2 59,101.2 55,105.2 | 93.09,63.39 R2_PINH1.2 | IC4.5 125.06,42.24 C3.+ 127.28,44.43 C1_BAT2.1 154.4,18.79 TP16.TP J3.2 | 93.09,63.39 92.1,62.4 90.3,62.4 89.42,61.52 U3.2 89.42,57.17 R1_PINH1.2 | Q2.3 79.98,26.2 80,26.2 | 80,26.2 82.14,26.2 R_CL1.2 | 121.19,45.69 121.19,45.27 109.28,33.36 98.75,33.36 93.63,28.23 91.69,28.23 89.89,30.04 81.02,30.04 80,29.01 80,26.2
32KHZ  (via drill 0.3)
  Top 0.15: R2_PINH1.1 94.04,61.2 90.72,61.2 U3.1 90.72,61.06 90.72,59.95 v90.44,59.67 | v34.21,58.43 31.99,58.43 17.59,44.03 17.59,43.33 U2.9
  Bottom 0.15: v34.21,58.43 86.28,58.43 88.09,60.23 89.89,60.23 v90.44,59.67
DN
  Top 0.15: 163.29,53.86 163.43,53.72 164.12,53.72 J2.B7 | 163.29,53.86 163.29,54.55 163.43,54.69 164.12,54.69 J2.A7 | 163.29,53.86 161.49,52.06 155.26,52.06 D1.4
DP
  Top 0.15: J2.A6 164.26,54.27 165.09,54.27 165.23,54.41 165.23,55.1 165.09,55.24 164.26,55.24 J2.B6 164.12,55.24 163.43,55.24 161.63,53.44 156.23,53.44 155.81,53.86 155.26,53.86 D1.6
EPD_3V3
  Top 0.15: J1.15 83.65,14.8 83.38,14.8 J1.16
  Top 0.3: C7.1 77.44,25.69 Q2.2 | Q2.2 78.93,24.2 84.6,24.2 86,25.6 86,26.2 84.06,28.14 | Q2.2 76,23.49 76,17.2 76.5,16.7 82.5,16.7 83.29,15.91 J1.16 | TP17.TP 95.53,23.91 EPD_C5.2 91.65,22.55 86,28.2 84.11,28.2 84.06,28.14 | 84.06,28.14 L1.2
EPD_3V3_C  (via drill 0.3, 0.35)
  Top 0.15: TP13.TP 5.12,31.56 5.12,32.11 5.02,32.22 | 81.58,25.05 81.72,25.19 R_CL1.1 | 77.84,27.2 Q2.1 77.71,26.71
  Top 0.3: U2.18 20.1,59.83 19.73,59.47 | 19.73,59.47 15.47,55.2 12,55.2 6.6,49.8 6.6,33.8 5.02,32.22 | 77.84,27.2 77.84,26.6 79.38,25.05 81.58,25.05 | v76.87,27.13 77.28,26.71 77.71,26.71 | 19.73,59.47 19.73,59.17 v24,54.9 | v28.4,50.4 30.4,48.4 v30.4,48.3
  Bottom 0.3: v76.87,27.13 53.88,50.12 40.58,50.12 40.16,49.7 40.16,49.23 38.98,48.04 30.87,48.04 30.61,48.3 v30.4,48.3 | v24,54.9 28.4,50.5 v28.4,50.4
EPD_BUSY  (via drill 0.3)
  Top 0.15: 91.27,15.63 99.44,15.63 101.66,13.42 102.77,13.42 103.6,14.25 103.6,19.65 102.21,21.03 TP9.TP | 91.27,15.63 86.98,15.63 86.84,15.49 86.98,15.36 86.84,15.22 86.84,14.8 J1.9 | v16.76,58.15 11.77,58.15 9.97,59.95 9.97,60.64 U2.26 | v31.99,42.92 31.99,40.84 63.99,8.85 73.96,8.85 76.17,11.06 88.22,11.06 91.27,14.11 91.27,15.63
  Bottom 0.15: v31.99,42.92 v16.76,58.15
EPD_CS  (via drill 0.3)
  Top 0.15: 86.03,16.07 86.98,17.02 101.24,17.02 101.52,17.29 101.66,17.29 102.21,17.85 TP10.TP | 86.03,16.07 85.32,15.36 85.32,14.8 J1.12 | 72.99,23.8 74.24,25.05 74.24,25.6 R9.1 | 72.99,23.8 72.99,23.39 D6.2 72.99,23.8 | v27.29,41.25 21.33,41.25 20.22,42.36 20.22,43.19 U2.11 | v71.61,24.36 72.44,24.36 72.99,23.8 | v77.97,20.62 82.68,20.62 82.96,20.34 82.96,18.49 84.45,17 85.6,17 86.03,16.57 86.03,16.07
  Bottom 0.15: v27.29,41.25 54.71,41.25 v71.61,24.36 76.45,19.51 76.87,19.51 v77.97,20.62
EPD_DC  (via drill 0.3)
  Top 0.15: v77.28,13.14 84.76,13.14 85.73,14.11 85.73,14.66 J1.11 | v12.88,42.09 12.46,42.5 12.46,43.19 U2.5 | v16.2,38.9 5.26,27.96 TP11.TP
  Bottom 0.15: v77.28,13.14 42.1,13.14 16.2,39.04 | 16.2,39.04 13.16,42.09 v12.88,42.09 | 16.2,39.04 v16.2,38.9
EPD_RST  (via drill 0.3)
  Top 0.15: 86.42,15.49 86.84,15.91 99.86,15.91 100.97,14.8 102.08,14.8 TP12.TP | 86.42,15.49 86.28,15.36 86.28,14.8 J1.10 | v17.17,58.57 16.34,59.4 16.34,60.64 U2.21 | v32.83,42.92 57.06,18.68 73.82,18.68 79.08,13.42 84.07,13.42 v84.62,13.97 | 86.42,15.49 v86.28,15.63
  Bottom 0.15: v32.83,42.92 v17.17,58.57 | v86.28,15.63 v84.62,13.97
FLASH_CS  (via drill 0.3)
  Top 0.15: 49.31,38.21 49.31,32.67 49.58,32.39 50.14,32.39 R5.1 | 49.31,38.21 49.86,38.76 50.28,38.76 D9.2 | 33.52,53.72 30.56,53.72 21.47,44.62 21.47,43.33 U2.12 | 33.52,53.72 33.79,53.72 U1.1 33.52,53.72 | 49.31,38.21 49.03,38.21 v38.64,48.59 | 33.52,53.72 v34.21,53.03
  Bottom 0.15: v34.21,53.03 v38.64,48.59
GDR
  Top 0.15: 70,11.34 87.53,11.34 90.3,14.11 90.3,14.66 J1.2 | Q3.1 68.06,13.28 70,11.34 | R4.2 68.95,10.29 70,11.34
GND  (via drill 0.35)  (67 unrouted)
  Top 0.15: U2.29_5 13.16,50.53 13.16,51.64 U2.29_6 | SJ1.1 64.9,10.29 R2.1 64.34,12.5 v63.7,12.5 | R4.1 68.03,11.77 v67.3,12.5 v68.1,12.5 | v75.2,12.4 71.85,15.75 EPD_C1.1 EPD_C2.1 68.35,18.2 v68,18.2 | C4_USB.2 153.32,47.88 v152,49.2 | v156.6,49.5 156.44,49.66 C5_USB.2 | U2.1 7.4,44.6 9,46.2 v9,47.2 | v9.5,51.2 10.03,51.72 U2.29_3 | U4.9 131.6,57.11 131.6,57.5 131.49,57.61 U4.1 | D6.1 71.46,21.36 v69.4,19.3 | U1.4 31.64,49.83 31,49.2 31,47.2 v32,46.2 | D10.1 33.62,43.18 v33.1,43.7 | C9.2 v7.51,95.41 v7.5,95.4 | v2.8,93.8 2.14,93.14 J4.G4 2.14,91.16 v2.6,90.7 | U3.13 86.88,50.42 87.56,49.74 C8.1 87.06,48.4 v85.9,48.4 | v94,46.4 96.2,46.4 v101,51.2 | v6.1,89.2 6.3,89.4 6.3,89.7 5.8,90.2 5.2,90.2 4.79,89.79 J4.P6 | SENSOR2.5 157.91,10.89 v158.5,10.3 | v160,10.2 160.77,9.43 C2.2 161.36,7.2 162,7.2 162.58,7.78 C1.2 | EPD_C7.1 87.75,17.55 v87.7,17.5 | J1.8 87.29,14.11 87.5,13.9 v87.8,13.9 | EPD_C9.1 84.4,18.21 v84.4,17.8 | v82.5,15.6 82.79,15.31 J1.17 | CHANGE_BUTTON.1 63.11,105.2 | C10_SUPERCAP.2 97.13,53.17 97.7,52.6 98.8,52.6 v98.9,52.7 | C6.2 44.8,107.1 v45.4,107.1 | v45.8,106.1 46.7,105.2 47,105.2 47.28,105.48 BOOT_BUTTON.1
  Top 0.152: BOOT_BUTTON.2 52,104.8 v52,104.2 52.4,103.8 53.6,103.8 v54.4,104.6 | C_DELAY.2 52,101.03 v52,102.2 | v56,106.2 57,107.2 59.21,107.2 C10.2 60.39,106.02 CHANGE_BUTTON.1 | 63.11,105.2 v63.5,105.2 | v64.9,104.8 65.79,105.69 CHANGE_BUTTON.2 | SENSOR2.7 v158.89,13.91 v158.9,13.9 | v159.7,14.7 v159.71,14.71 SENSOR2.1
  Bottom 0.15: v63.7,12.5 v67.3,12.5 | v68.1,12.5 73.7,12.5 74,12.2 75,12.2 v75.2,12.4 | v152,49.2 152.3,49.5 v156.6,49.5 | v9,47.2 9,50.7 v9.5,51.2 | v69.4,19.3 69.3,19.2 69,19.2 v68,18.2 | v32,46.2 33.1,45.1 v33.1,43.7 | v2.8,93.8 3.2,94.2 6.3,94.2 v7.5,95.4 | v85.9,48.4 85,47.5 85,46.9 85.5,46.4 v94,46.4 | v101,51.2 101,51.9 100.2,52.7 v98.9,52.7 | v2.6,90.7 4.1,89.2 v6.1,89.2 | v158.5,10.3 158.6,10.2 v160,10.2 | v87.7,17.5 88,17.2 88,14.1 v87.8,13.9 | v84.4,17.8 82.5,15.9 v82.5,15.6 | v45.4,107.1 45.8,106.7 v45.8,106.1
  Bottom 0.152: v52,104.2 v52,102.2 | v54.4,104.6 v56,106.2 | v63.5,105.2 64.5,105.2 v64.9,104.8 | v158.9,13.9 v159.7,14.7
  pour Top: 75.96,10.26 75.98,10.28 94.02,10.28 94.04,10.26 94.06,10.24 94.08,10.22 94.08,0.28 169.92,0.28 169.92,67.12 91.98,67.12 91.96,67.14 91.94,67.16 91.92,67.18 91.92,111.12 68.08,111.12 68.08,108.18 68.06,108.16 68.04,108.14 68.02,108.12 19.98,108.12 19.96,108.14 19.94,108.16 19.92,108.18 19.92,111.12 0.08,111.12 0.08,0.28 75.92,0.28 75.92,10.22 75.94,10.24
  pour Bottom: 75.96,10.26 75.98,10.28 94.02,10.28 94.04,10.26 94.06,10.24 94.08,10.22 94.08,0.28 169.92,0.28 169.92,67.12 91.98,67.12 91.96,67.14 91.94,67.16 91.92,67.18 91.92,111.12 68.08,111.12 68.08,108.18 68.06,108.16 68.04,108.14 68.02,108.12 19.98,108.12 19.96,108.14 19.94,108.16 19.92,108.18 19.92,111.12 0.08,111.12 0.08,61.28 6.02,61.28 6.04,61.26 6.06,61.24 6.08,61.22 6.08,43.18 6.06,43.16 6.04,43.14 6.02,43.12 0.08,43.12 0.08,0.28 75.92,0.28 75.92,10.22 75.94,10.24
GPIO8  (via drill 0.3)
  Top 0.15: v18.56,39.18 18.56,38.76 18.84,38.48 19.39,38.48 R1.1 | v18.56,41.81 18.56,43.05 18.7,43.19 U2.10
  Bottom 0.15: v18.56,41.81 v18.56,39.18
I2C_PW  (via drill 0.3)
  Top 0.15: R2_PINH.2 156.33,7.88 158.5,7.88 R1_PINH.2 158.9,7.7 | C1.1 163.06,6.49 160.8,6.49 C2.1 160.66,6.35 159.18,7.7 158.9,7.7 | 158.16,13.14 159.28,13.14 160.11,13.97 | 158.16,13.14 158.03,13.14 SENSOR2.6 | 160.11,13.97 160.8,13.97 SENSOR2.2 | v24.38,57.04 21.47,59.95 21.47,60.64 U2.17 | v156.92,14.94 157.2,14.66 157.89,14.66 SENSOR2.8 158.03,14.66 158.94,14.66 159.63,13.97 160.11,13.97 | 158.16,13.14 159,12.3 159,7.8 158.9,7.7
  Bottom 0.15: v24.38,57.04 84.62,57.04 126.73,14.94 v156.92,14.94
INT_RTC  (via drill 0.3)
  Top 0.15: v88.78,57.18 88.78,55.94 93.49,51.23 94.04,51.23 R1_PINH1.1 | v88.22,59.67 88.22,61.06 U3.3 | v14.27,40.28 16.2,42.22 16.2,43.19 U2.8 16.34,43.33 16.34,44.03 v30.75,58.43 | v6.23,18.54 5.26,17.57 TP15.TP
  Bottom 0.15: 88.78,59.12 v88.78,57.18 | v88.22,59.67 88.78,59.12 | v14.27,40.28 14.27,26.57 v6.23,18.54 | 88.78,59.12 90.58,59.12 91,59.54 91,59.81 90.3,60.51 32.83,60.51 v30.75,58.43
IO/BOOT  (via drill 0.3)
  Top 0.15: R_BOOT.1 53.46,105.52 52.91,105.52 51.94,106.49 51.94,106.9 51.38,107.46 50.83,107.46 BOOT_BUTTON.3 50.69,107.46 50.14,107.46 49.44,106.77 49.44,106.21 49.03,105.8 48.89,105.8 48.48,106.21 48.48,106.9 47.92,107.46 47.37,107.46 BOOT_BUTTON.4 47.23,107.46 46.95,107.18 46.54,107.18 46.18,107.18 C6.1 44.25,105.25 v44.25,103.79 | v23.96,69.92 23.96,60.78 U2.15
  Bottom 0.15: v23.96,69.92 23.96,83.5 v44.25,103.79
IO/CHANGE  (via drill 0.3)
  Top 0.15: R_CHANGE.2 68.27,106.77 67.17,106.77 66.48,107.46 65.93,107.46 CHANGE_BUTTON.3 65.79,107.46 65.09,107.46 64.4,106.77 64.4,106.3 64.4,106.07 64.13,105.8 63.85,105.8 63.57,106.07 63.57,106.77 62.88,107.46 62.33,107.46 CHANGE_BUTTON.4 | v19.94,65.22 18.42,63.69 15.93,63.69 13.85,61.61 13.85,60.78 U2.23 | v59.55,104.76 59.55,105.47 C10.1
  Top 0.152: C10.1 60.91,105.59 61.9,104.6 63.6,104.6 64.4,105.4 64.4,106.3
  Bottom 0.15: v19.94,65.22 59.49,104.76 v59.55,104.76
MISO  (via drill 0.3, 0.35)
  Top 0.15: v56.92,33.08 56.92,32.67 57.06,32.53 57.62,32.53 R8.1 | 56.92,38.48 57.2,38.76 57.48,38.76 D12.2 | 34.76,52.61 34.49,52.33 33.93,52.33 U1.2 | 34.76,52.61 34.76,60.78 v16.17,79.37 8.09,87.45 8.09,88.56 5.96,90.7 5.12,90.7 J4.P7 | 56.92,38.48 43.63,51.78 v41.83,51.78 | 34.76,52.61 v35.32,52.61 | 56.92,38.48 v56.78,38.35 | U2.27 8.67,61.63 5.4,64.9 4.3,64.9 3.51,65.69 TP6.TP 3.51,66.65 14.03,77.17 14.37,77.51 15.26,78.4 v15.4,78.4
  Bottom 0.15: v56.92,33.08 56.92,38.21 v56.78,38.35 | v41.83,51.78 36.15,51.78 v35.32,52.61 | v15.4,78.4 16.17,79.17 v16.17,79.37
MOSI  (via drill 0.3)
  Top 0.15: D11.2 54.98,38.76 54.71,39.04 v54.15,39.04 53.74,39.04 42.94,49.84 41.69,49.84 U1.5 41.55,49.84 41.1,49.84 v40.82,49.56 | v76.59,17.43 82.57,17.43 84.35,15.65 84.35,14.8 J1.14 | v56.09,32.11 55.68,32.53 55.4,32.53 55.26,32.39 R7.1 | v13.02,40.28 14.96,42.22 14.96,43.19 U2.7 | v5.82,21.86 5.26,21.31 5.26,20.76 TP7.TP | v10.53,74.36 10.53,81.84 5.96,86.41 5.12,86.41 J4.P3
  Bottom 0.15: v76.59,17.43 61.91,32.11 v56.09,32.11 54.15,34.05 v54.15,39.04 | v5.82,21.86 13.02,29.07 v13.02,40.28 11.63,41.67 | v10.53,74.36 10.53,42.78 11.63,41.67 | v40.82,49.56 40.82,49.36 33.82,42.36 13.3,42.36 13.02,42.64 12.6,42.64 11.63,41.67
N$1  (via drill 0.3)
  Top 0.15: 116.48,44.03 116.48,43.75 116.06,43.33 115.79,43.33 115.23,42.78 115.23,42.22 C1_BAT1.1 | 116.48,44.03 117.59,44.03 | 117.59,44.03 118.56,44.03 IC4.3 | 116.48,44.03 D2.1 | 117.59,44.03 117.59,45.41 118,45.83 118.56,45.83 IC4.1 118.69,45.83 119.11,45.83 v119.53,46.24 | v127.97,50.81 128.94,50.81 Q1.2
  Bottom 0.15: v127.97,50.81 124.1,50.81 v119.53,46.24
N$2  (via drill 0.3)
  Top 0.15: v118.83,55.94 115.79,55.94 R1_BAT.2 | v123.54,54.55 123.27,54.27 122.57,54.27 MCP73831.1
  Bottom 0.15: v118.83,55.94 122.16,55.94 v123.54,54.55
N$3
  Top 0.15: CHG_LED.C 111.49,56.07 111.49,56.49 111.77,56.77 113.43,56.77 113.71,56.49 113.71,56.35 114.12,55.94 114.4,55.94 R1_BAT.1
N$4
  Top 0.15: R2_BAT.2 119.25,51.64 119.25,53.58 119.94,54.27 MCP73831.5
N$5
  Top 0.15: R2_USB.1 156.92,54.27 161.49,54.27 163.43,56.21 164.12,56.21 J2.B5
N$6  (via drill 0.3)
  Top 0.15: v151.52,53.44 147.92,53.44 R2_USB1.2 | v163.29,53.17 164.12,53.17 J2.A5
  Bottom 0.15: v151.52,53.44 163.01,53.44 v163.29,53.17
N$10
  Top 0.15: C4.1 98.89,34.05 98.33,34.05 93.07,28.79 92.66,28.79 92.52,28.93 D4.1 92.38,29.07 91.83,29.07 85.87,35.02 85.04,35.02 D3.2
N$11
  Top 0.15: R_CAPACITOR.1 90.16,63.42 90.16,63.97 88.92,65.22 88.78,65.22 88.64,65.08 D7.1
N$12
  Top 0.15: C_DELAY.1 51,101.05 50.99,101.06 IC2.5
N$13  (via drill 0.3)
  Top 0.15: v79.08,15.63 79.22,15.49 79.22,14.8 J1.24 | v77.56,19.51 77.97,19.93 78.39,19.93 EPD_C12.2
  Bottom 0.15: v79.08,15.63 79.08,17.99 v77.56,19.51
N$15  (via drill 0.3)
  Top 0.15: v80.47,15.63 80.33,15.49 80.33,14.8 J1.22 | v81.16,19.51 81.58,19.93 81.99,19.93 EPD_C10.2
  Bottom 0.15: v80.47,15.63 80.47,18.82 v81.16,19.51
N$17  (via drill 0.3)
  Top 0.15: v81.3,15.63 81.3,14.8 J1.20 | v84.94,20.06 85.73,20.06 EPD_C8.2
  Bottom 0.15: v81.3,15.63 81.3,16.42 v84.94,20.06
N$18  (via drill 0.3)
  Top 0.15: v81.89,15.63 81.85,15.59 81.85,14.8 J1.19 | v86.84,19.65 87.25,20.06 87.67,20.06 EPD_C7.2
  Bottom 0.15: v81.89,15.63 81.72,15.81 81.72,16.23 85.13,19.65 v86.84,19.65
N$19  (via drill 0.3)
  Top 0.15: v82.68,13.97 82.27,14.39 82.27,14.66 J1.18 | v88.78,20.06 89.61,20.06 EPD_C6.2
  Bottom 0.15: v88.78,20.06 88.78,19.56 83.18,13.97 v82.68,13.97
N$21  (via drill 0.3)
  Top 0.15: v85.73,13.42 88.09,13.42 88.78,14.11 88.78,14.66 J1.5 | v70.91,18.12 70.5,17.71 70.5,17.43 EPD_C2.2
  Bottom 0.15: v85.73,13.42 77.7,13.42 72.99,18.12 v70.91,18.12
N$22
  Top 0.15: J1.4 89.33,14.66 89.33,14.11 88.09,12.86 77.97,12.86 77.7,12.58 77.14,12.58 72.3,17.43 71.88,17.43 EPD_C1.2
PREVGH  (via drill 0.3)
  Top 0.15: v85,17.92 85,19.31 84.25,20.06 84.07,20.06 EPD_C9.2 | v92.38,29.9 92.38,32.94 D5.1 | J1.21 80.8,14.1 81.03,13.87 v81.78,13.87
  Bottom 0.15: v81.78,13.87 85,17.09 v85,17.92 85.2,18.12 86.01,18.12 92.38,24.5 v92.38,29.9
PREVGL  (via drill 0.3)
  Top 0.15: v79.78,15.63 79.78,14.8 J1.23 | v79.36,19.51 79.78,19.93 80.19,19.93 EPD_C11.2 | v90.58,24.36 95.15,28.93 95.84,28.93 D4.2
  Bottom 0.15: 79.78,19.09 v79.78,15.63 | v79.36,19.51 79.78,19.09 | v90.58,24.36 85.04,24.36 79.78,19.09
RESE
  Top 0.15: 71.61,13.97 71.47,13.97 R3.2 71.61,13.97 | 71.61,13.97 71.74,13.97 73.96,11.75 77.56,11.75 77.7,11.89 77.97,11.61 87.25,11.61 89.75,14.11 89.75,14.66 J1.3 | 71.61,13.97 71.61,13.55 71.19,13.14 69.67,13.14 69.39,13.42 69.39,15.22 68.56,16.05 68.56,16.46 68.28,16.74 66.89,16.74 66.76,16.6 66.76,15.91 Q3.2
RESE'
  Top 0.15: SJ1.2 66.2,10.23 66.2,11.89 R2.2 66.06,12.03 66.06,16.46 66.62,17.02 68.42,17.02 68.83,16.6 68.83,16.19 70.08,14.94 70.08,13.97 R3.1
RESET  (via drill 0.3)
  Top 0.15: C5.1 20.5,105.52 19.8,105.52 19.53,105.8 19.53,107.18 19.94,107.6 21.19,107.6 21.33,107.46 22.16,107.46 RESET_BUTTON.4 22.3,107.46 22.85,107.46 23.55,106.77 23.55,106.21 23.96,105.8 24.1,105.8 24.52,106.21 24.52,106.9 25.07,107.46 25.62,107.46 RESET_BUTTON.3 25.76,107.46 26.45,107.46 27.15,106.77 27.84,106.77 R_RESET.1 27.98,106.77 28.39,106.77 v33.24,101.92 46.7,101.92 IC2.1 | v9.97,48.87 9.97,43.33 U2.3
  Bottom 0.15: v9.97,48.87 9.97,78.65 v33.24,101.92
RTC_RST  (via drill 0.3)
  Top 0.15: v23.41,62.17 22.71,61.48 22.71,60.78 U2.16 | v86.42,62.44 86.84,62.03 86.84,61.2 U3.4
  Bottom 0.15: v23.41,62.17 86.15,62.17 v86.42,62.44
RX
  Top 0.3: TP2.TP 17.8,64.2 15,64.2 12.48,61.68 U2.24
SCK  (via drill 0.3)
  Top 0.15: v11.77,40.28 13.71,42.22 13.71,43.19 U2.6 13.85,43.33 13.85,44.03 24.93,55.1 24.93,69.65 5.96,88.62 5.12,88.62 J4.P5 | TP8.TP 5.26,24.22 5.26,24.91 v5.82,25.46 13.85,25.46 32.83,44.44 34.07,44.44 34.21,44.58 D10.2 34.35,44.72 34.62,44.72 36.01,43.33 37.12,43.33 R6.1 37.26,43.19 37.81,43.19 v38.09,42.92 | v76.59,20.06 76.59,18.96 77.84,17.71 82.81,17.71 84.76,15.75 84.76,14.8 J1.13 | v44.46,49.01 42.38,51.09 41.69,51.09 U1.6
  Bottom 0.15: v11.77,40.28 11.77,31.42 v5.82,25.46 | v76.59,20.06 47.64,49.01 v44.46,49.01 38.36,42.92 v38.09,42.92
SCL  (via drill 0.3)
  Top 0.15: 161.53,11.43 160.94,12.03 160.94,12.31 SENSOR2.4 | 161.53,11.43 164.13,8.84 164.13,6.38 163.55,5.8 158.14,5.8 157.45,6.49 156.52,6.49 R2_PINH.1 | v141.96,48.73 133.51,57.18 133.38,57.04 132.96,57.04 U4.7 | v164.81,21.45 165.23,21.03 165.23,20.89 165.37,20.76 J3.4 165.51,20.89 166.2,20.89 166.89,20.2 166.89,16.29 162.03,11.43 161.53,11.43 | v18,59.54 17.59,59.95 17.59,60.64 U2.20 | v90.44,53.17 90.86,52.75 90.86,52.06 90.72,51.92 U3.16
  Bottom 0.15: 141.96,47.07 141.96,44.3 v164.81,21.45 | 141.96,47.07 v141.96,48.73 | v18,59.54 19.94,57.6 84.48,57.6 89.47,52.61 89.89,52.61 v90.44,53.17 126.31,53.17 132.41,47.07 141.96,47.07
SDA  (via drill 0.3, 0.35)
  Top 0.15: v157,7.18 157.2,6.98 158.09,6.98 158.44,6.63 158.54,6.63 R1_PINH.1 | 161.91,15.08 161.49,15.49 156.39,15.49 155.6,14.7 155.6,10.2 157,8.8 v157,8.4 | 161.91,15.08 161.91,13.55 161.49,13.14 160.94,13.14 SENSOR2.3 | 161.91,15.08 164.4,15.08 166.62,17.29 166.62,19.51 166.48,19.65 165.51,19.65 J3.3 165.37,19.79 164.68,19.79 v136.84,47.62 | v131.57,58.15 132.54,58.15 132.82,57.88 132.82,57.74 U4.8 | v89.61,53.17 89.47,53.03 89.47,51.92 U3.15 | v22.44,61.89 19.25,61.89 18.84,61.48 18.84,60.78 U2.19
  Bottom 0.15: v22.44,61.89 22.99,61.89 27.01,57.88 84.9,57.88 v89.61,53.17 94.6,58.15 v131.57,58.15 136.84,52.89 v136.84,47.62 | v157,8.4 v157,7.18
SRC  (via drill 0.3)
  Top 0.15: C4.2 98.89,35.44 97.92,35.44 95.84,33.36 95.84,33.08 D5.2 95.7,33.08 93.76,33.08 91,35.85 84.21,35.85 84.07,35.72 84.07,32.81 83.93,32.67 | v67.45,16.19 67.45,13.83 Q3.3 | v65.79,27.54 73.41,27.54 77.28,31.42 82.27,31.42 83.52,32.67 83.93,32.67 | 83.93,32.67 L1.1
  Bottom 0.15: v67.45,16.19 67.45,25.88 v65.79,27.54
SS_SD  (via drill 0.3)
  Top 0.15: v8.59,50.95 11.22,48.32 11.22,43.33 U2.4 | v6.51,85.02 6.09,85.44 5.4,85.44 J4.P2 | D8.2 11.04,95.2 10,95.2 9,94.2 7.71,94.2 v7.38,94.53 7.38,94.82 7,95.2 6.86,95.2 R10.1
  Bottom 0.15: v8.59,50.95 8.59,82.94 v6.51,85.02 7.38,85.89 v7.38,94.53
TX
  Top 0.3: TP1.TP 11.21,62.69 U2.25
USB_D+  (via drill 0.3)
  Top 0.15: v46.54,49.56 48.2,47.9 95.7,47.9 113.71,65.91 136.7,65.91 148.61,54 152.63,54 D1.1 | v25.48,41.81 23.96,43.33 U2.14
  Bottom 0.15: v46.54,49.56 41.71,49.56 33.96,41.81 v25.48,41.81
USB_D-  (via drill 0.3)
  Top 0.15: v88.78,50.4 94.73,50.4 95.01,50.67 95.01,53.44 107.75,66.18 141.82,66.18 153.74,54.27 153.74,52.87 153.06,52.2 152.77,52.2 D1.3 | v28.12,49.43 22.71,44.03 22.71,43.33 U2.13
  Bottom 0.15: v88.78,50.4 88.28,50.9 43.4,50.9 40.72,53.58 32.27,53.58 v28.12,49.43
VBAT
  Top 0.3: TP3.TP 130.21,61.71 C2_BAT.1 | C2_BAT.1 128.69,57.51 129.09,57.11 U4.2 U4.3 129.41,56.61 128.07,55.27 Q1.3 | MCP73831.3 123.79,57.51 C2_BAT.1
VBUS
  Top 0.3: R1_PWRUSB.2 115.64,45.41 D2.2 116.41,49.79 114,52.2 114,53.41 C1_BAT.1 | C1_BAT.1 112.9,55.41 CHG_LED.A | C1_BAT.1 115.29,54.7 118.38,54.7 MCP73831.4 119.89,56.21 | 119.89,56.21 127.21,63.53 TP14.TP | 119.89,56.21 121,55.1 121,53.8 121.3,53.5 124.38,53.5 Q1.1 128,49.88 128,49.2 129,48.2 144.53,48.2 PFMF.050.1.2 150.73,43.54 155.07,47.88 C4_USB.1 153.83,49.22 C5_USB.1 153.83,52.13 154.85,53.15 155,53.15 D1.5
VRTC
  Top 0.3: R_CAPACITOR.2 88.96,62.36 88.8,62.2 88.8,58 88,57.2 88,51.93 U3.14 88.14,49.61 C8.2 95.7,48.9 97,50.2 97,51.13 C10_SUPERCAP.1
VUSB
  Top 0.15: J2.B9 164.26,52.2 164.26,52.06 J2.A4 164.4,51.92 164.68,52.2 164.81,52.2 164.95,52.33 165.09,52.33 165.51,52.75 165.51,56.07 164.95,56.63 164.26,56.63 J2.B4 164.26,56.77 164.26,56.91 J2.A9
  Top 0.3: PFMF.050.1.1 162.06,51.91 J2.A4
(copper drawn outside any net)
  shapes: Top area x1